# EAGLE board mod_panel_voltage (EAGLE 8.4.1)
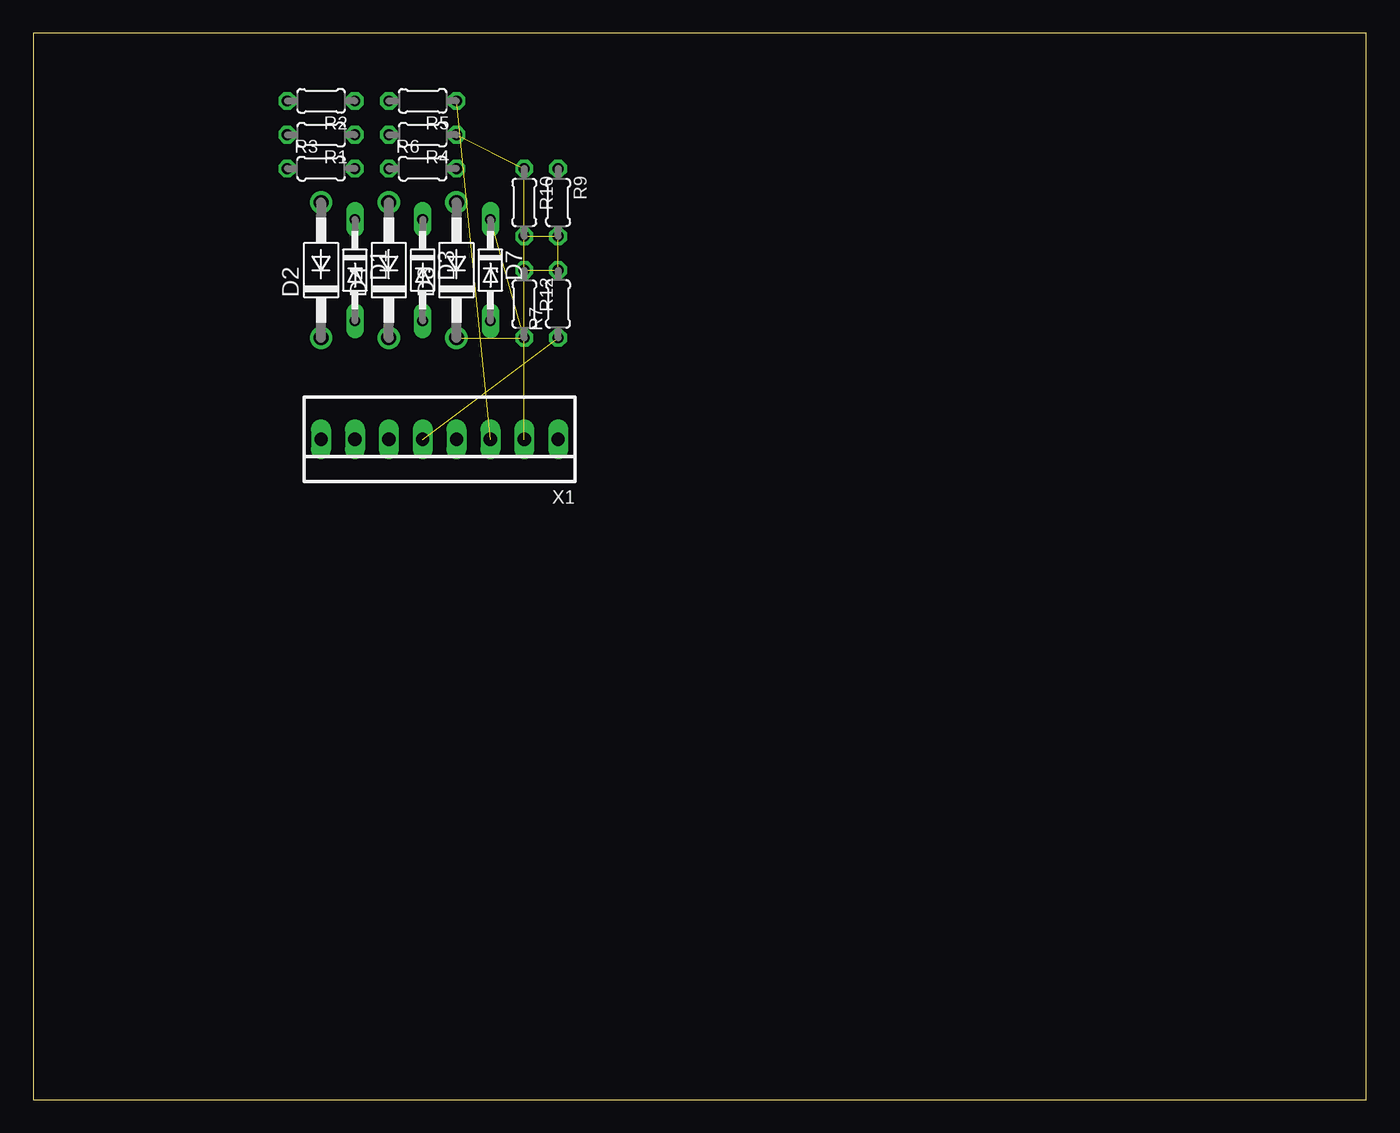
[diagram p0: board, top side]
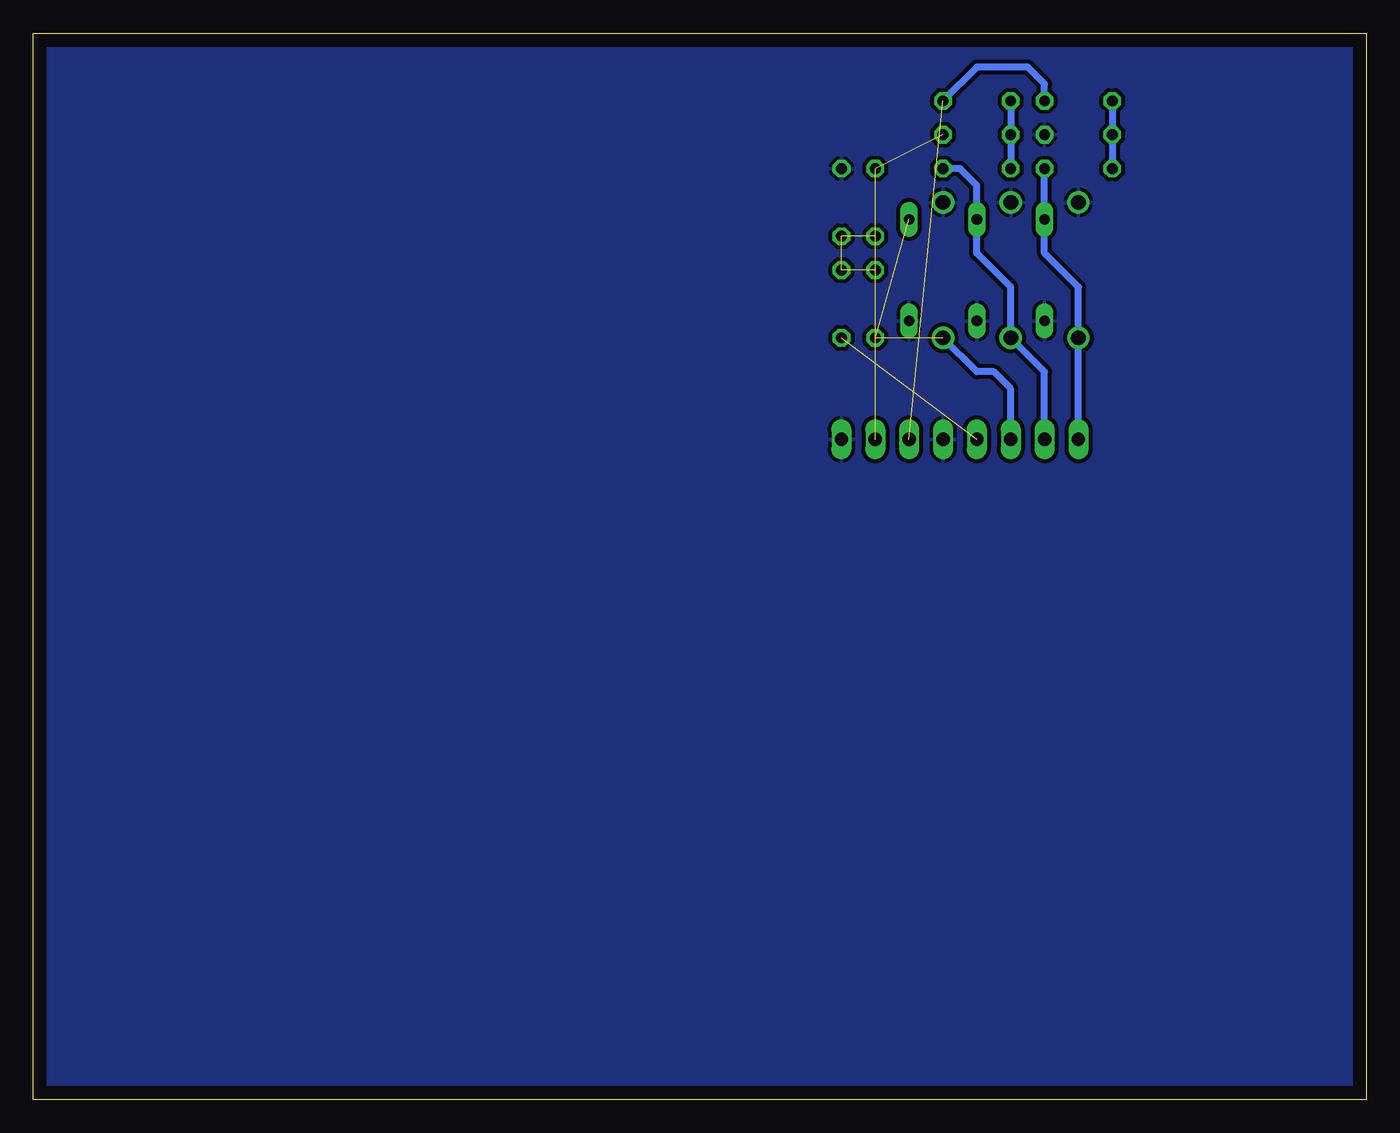
[diagram p1: board, bottom side, seen from below]

Size 100 x 80 mm. Coordinates in mm from the lower left corner, seen from the top.
Outline: 0,0 100,0 100,80 0,80 0,0
Copper layers (1*16): Top 0.035mm / dielectric 1.5mm / Bottom 0.035mm
Design rules "default": minimum track width 6mil, minimum drill 0.35mm, track to track 6mil, track to pad 6mil, pad to pad 6mil, via to via 6mil, smd to smd 6mil, copper to edge 40mil, drill to drill 6mil, minimum pad ring 10mil, minimum via ring 8mil, stop-mask expansion 4mil, vias tented up to drill 0mil, thermal gap 10mil

## Footprints (pad centres in the part's own frame; a part is rotated, then mirrored left to right if it is on the bottom)
DO34Z7 = drill 0.813 long: A 3.81,0; C -3.81,0
DO41-10 = drill 1.118: A 5.08,0; C -5.08,0
0204/5 = drill 0.813 octagon: 1 -2.54,0; 2 2.54,0
22-23-2081 = drill 1 long: 1 -8.89,0; 2 -6.35,0; 3 -3.81,0; 4 -1.27,0; 5 1.27,0; 6 3.81,0; 7 6.35,0; 8 8.89,0

## Placement (x,y rotation side)
D1  [DO34Z7]  24.13,62.23 270 top
D2  1N4004  [DO41-10]  21.59,62.23 90 top
D3  [DO34Z7]  29.21,62.23 270 top
D4  1N4004  [DO41-10]  26.67,62.23 90 top
D7  [DO34Z7]  34.29,62.23 270 top
D8  1N4004  [DO41-10]  31.75,62.23 90 top
R1  [0204/5]  21.59,72.39 180 top
R2  [0204/5]  21.59,74.93 180 top
R3  [0204/5]  21.59,69.85 0 top
R4  [0204/5]  29.21,72.39 180 top
R5  [0204/5]  29.21,74.93 180 top
R6  [0204/5]  29.21,69.85 0 top
R7  [0204/5]  39.37,59.69 90 top
R9  [0204/5]  39.37,67.31 270 top
R10  [0204/5]  36.83,67.31 270 top
R12  [0204/5]  36.83,59.69 270 top
X1  22-23-2081  [22-23-2081]  30.48,49.53 180 top

## Library data of the parts
D1-D4 D7 D8 = diode
R1-R7 R9 R10 R12 = resistor
X1 = con-molex; MF: MOLEX; MPN: 22-23-2081; OC_FARNELL: 1756826; OC_NEWARK: 01C7592

## Nets
ADC1: D3.C D4.C R6.2 X1.7
ADC2: D1.C D2.C R3.2 X1.8
ADC3: D7.C D8.C R12.2 X1.6
GND: D1.A D2.A D3.A D4.A D7.A D8.A R1.1 R9.1 X1.1 X1.4
N$2: R7.2 R9.2 R10.2 R12.1
N$5: R1.2 R2.2 R3.1
N$9: R4.2 R5.2 R6.1
P+: R2.1 R5.1 X1.3
P-: R4.1 R10.1 X1.2
VCOMP: R7.1 X1.5

## Tracks (layer width: path | path; a pad name or v marks a point on that pad's centre or on a via)
ADC1
  Bottom 0.508: X1.7 24.13,54.61 D4.C 26.67,60.96 29.21,63.5 D3.C 29.21,68.58 30.48,69.85 R6.2
ADC2
  Bottom 0.508: X1.8 D2.C 21.59,60.96 24.13,63.5 D1.C R3.2
ADC3  (2 unrouted)
  Bottom 0.508: X1.6 26.67,53.34 27.94,54.61 29.21,54.61 D8.C
GND
  pour Bottom (isolate 0.305): 0,80.01 100.33,80.01 100.33,0 0,0
N$2  (3 unrouted)
N$5
  Bottom 0.508: R2.2 R1.2 R3.1
N$9
  Bottom 0.508: R5.2 R4.2 R6.1
P+  (1 unrouted)
  Bottom 0.508: R2.1 24.13,76.2 25.4,77.47 29.21,77.47 R5.1
P-  (2 unrouted)
VCOMP  (1 unrouted)